# Altium PCB PanelFK2.PcbDoc
Units mm, origin at the board's own origin, x right, y up, seen from the top; angles counter-clockwise.
Board outline 152.4 x 101.6 mm, 2 copper layers (Top Layer, Bottom Layer); 26 components, 21 nets, 92 pads, 0 vias.
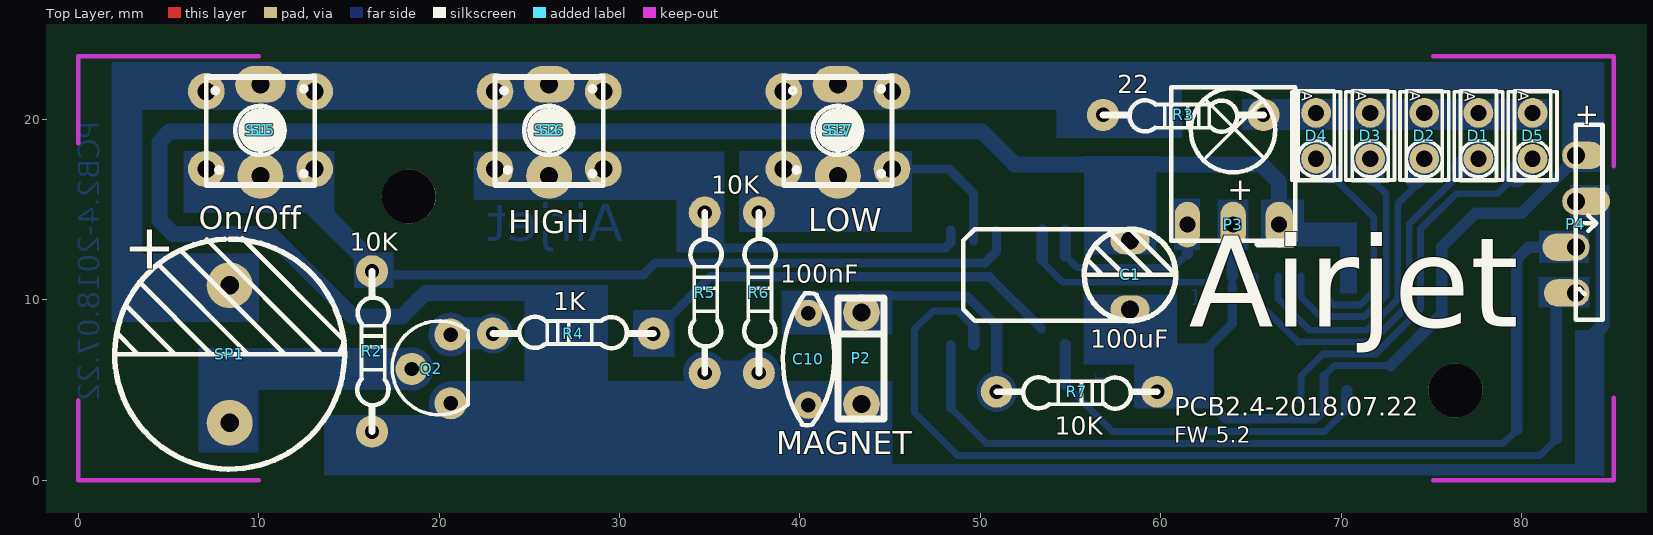
[diagram p0: Top Layer view]
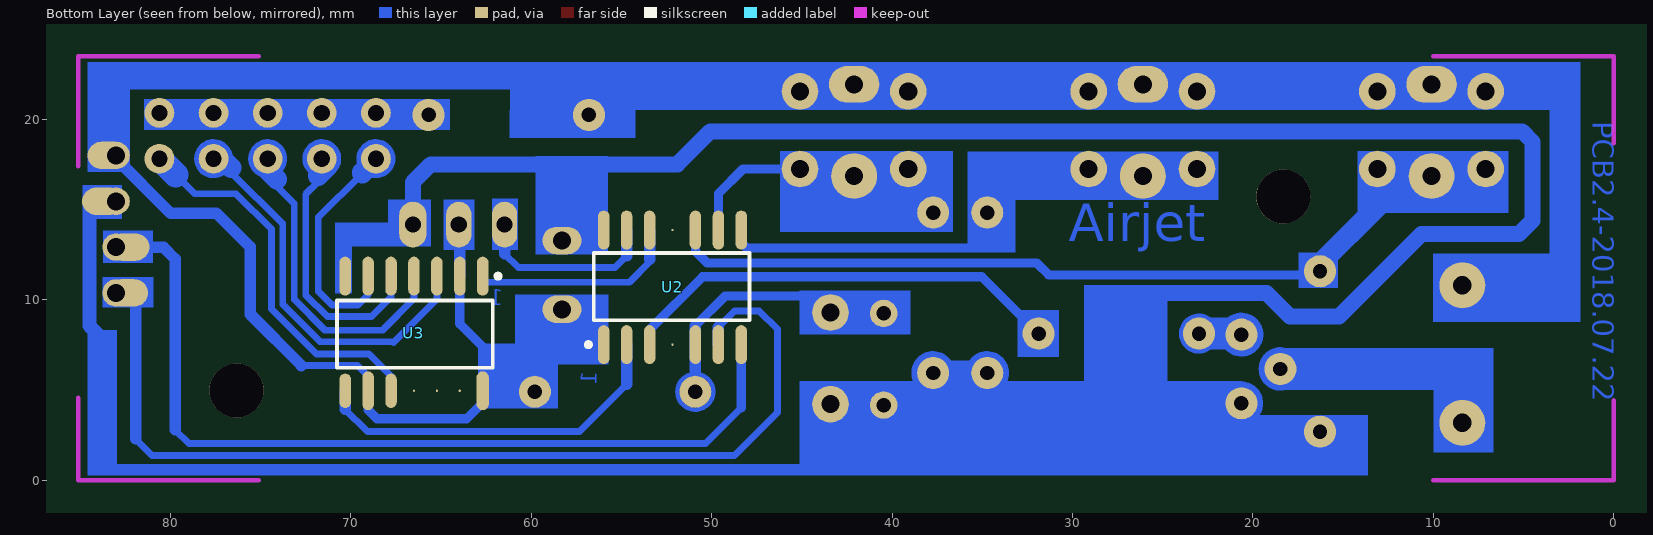
[diagram p1: Bottom Layer view, seen from below]

## Layer stack, top to bottom
Top Solder: solder mask 0.0102, Solder Resist, Dk 3.5
Top Layer: signal copper 0.0356
Dielectric1: dielectric 0.32, FR-4, Dk 4.8
Bottom Layer: signal copper 0.0356
Bottom Solder: solder mask 0.0102, Solder Resist, Dk 3.5

## Board outline
-14.397,-18.256 138.003,-18.256 138.003,83.344 -14.397,83.344

## Design rules (kind name [scope] priority, off if disabled: settings)
Clearance [All] p1: gap=0.254
FabricationTestPointUsage TestPointUsage [All] p1: valid=0 allowmultiple=FALSE
FabricationTestpoint Testpoint [All] p1: side=3 testpointundercomponent=TRUE minsize=1.016 maxsize=2.54 preferedsize=1.524 minholesize=0 maxholesize=1.016 preferedholesize=0.813 testpointgrid=0.025 allowsidetop=TRUE allowsidebottom=TRUE usegrid=TRUE gridtolerance=0
PolygonConnect [All] p1: connectstyle=Relief reliefconductorwidth=0.254 reliefentries=4 polygonreliefangle="90 Angle" airgapwidth=0.254
RoutingVias [All] p1: holewidth=0.711 width=1.27 viastyle="Through Hole" minholewidth=0.711 minwidth=1.27 maxholewidth=0.711 maxwidth=1.27
SolderMaskExpansion [All] p1: expansion=0.102
Width [All] p1: maxlimit=2.54 minlimit=0.254 preferedwidth=0.635 minimp=50.000000 maximp=50.000000 favimp=50.000000
27 further rules are at their usual default settings.

## Classes and differential pairs
component class DDFK: C1 C10 D1 D2 D3 D4 D5 P2 P3 P4 P5 Q2 R2 R4 R5 R6 R7 S1 S2 S3 SP1 U2 U3

## Components (designator, comment, footprint, x,y, rotation, side; value= is the part's Value field where it differs from the comment)
C1 "100uF" RB.15/.2 58.293,10.109 r90 top
C10 "100nF" RAD0.2 40.462,4.166 r90 top
D1 "L1" LED0.5Rec 77.6,19.089 r270 top locked
D2 "L2" LED0.5Rec 74.6,19.089 r270 top locked
D3 "L3" LED0.5Rec 71.6,19.089 r270 top locked
D4 "L4" LED0.5Rec 68.6,19.089 r270 top locked
D5 "L5" LED0.5Rec 80.6,19.089 r270 top locked
P2 "Magnet" Magnet 43.409,9.296 r270 top
P3 "IrReceiver" IrRec1 64,19.4 r0 top locked
P4 "Header 4" xH4RALim 83,18 r180 top
Q2 "2N3904" TO92BS2 20,6.167 r270 top
R2 "10K" RES0.35 16.281,2.692 r90 top
R3 "22" RES0.35 56.794,20.244 r0 top (schematic designator R1)
R4 "1K" RES0.35 31.877,8.128 r180 top
R5 "10K" RES0.35 34.722,5.944 r90 top
R6 "10K" RES0.35 37.719,5.944 r90 top
R7 "10K" RES0.35 50.902,4.902 r0 top
S1 "On/Off" PUSHBOT2 10.1,19.4 r270 top locked
S2 "HIGH" PUSHBOT2 26.1,19.4 r270 top locked
S3 "LOW" PUSHBOT2 42.1,19.4 r270 top locked
S15 "100/2W" PUSHBOT4 10.1,19.4 r180 top
S16 "100/2W" PUSHBOT4 26.1,19.4 r180 top
S17 "100/2W" PUSHBOT4 42.1,19.4 r180 top
SP1 "BUZZER" RB.3/.6 8.392,10.8 r90 top
U2 "ATtiny24A-SSU" SOIC14#1 55.975,7.513 r90 bottom
U3 "MC74HC164AN" SOIC14#2 62.682,11.31 r270 bottom

## Footprints (in the part's own frame and the unit in brackets; to place one, negate y for a bottom-side part, rotate by r counter-clockwise, add the part's x,y. Pads: shape width x height; smd on the part's side, far side on the other; paste and mask are expansions set on the pad)
IrRec1 [mm] "38KHz Ir Receiver"
  oval 1.397x2.54 hole 0.9: 1(-2.531,-5.231) 2(0.009,-5.231)
  oval 1.524x2.54 hole 0.9: 3(2.549,-5.231)
  silkscreen extent -3.42,-6.32 3.44,2.39
LED0.5Rec [mil] "Led 0.5mm Rectangular"
  round 65 hole 35.43: 1(-50,0) 2(50,0)
  silkscreen extent -98,-53 98,53
Magnet [mil]
  round 80 hole 39.37: 1(0,0) 2(200,0)
  silkscreen extent -31,-51 232,49
PUSHBOT2 [mm] "NO-2pin"
  oval 2.032x2.794 hole 1: 1(-2.54,0)
  round 2.54 hole 1: 2(2.54,0)
  silkscreen extent -2.92,-3 3.08,3
PUSHBOT4 [mm]
  round 2.032 hole 1: 1(3,-2.15) 2(3,2.15) 3(-3,-2.15) 4(-3,2.15)
  silkscreen extent -3,-3 3,3
RAD0.2 [mil]
  round 60 hole 31.5: 1(0,0) 2(200,0)
  silkscreen extent -44,-57 244,55
RB.3/.6 [mil]
  round 100 hole 40: 1(0,0) 2(-300,0)
  silkscreen extent -401,-251 102,251
RB.15/.2 [mil]
  oval 60x85 hole 39.37: 1(-25,0) 2(125,0)
  silkscreen extent -50,-100 150,100
RES0.35 [mil] "Diode, Axial; Body 5.2 x 2.7 mm (LxDia. max), Lead Dia. 0.86 mm (max)"
  round 70 hole 31.5: 1(0,0)
  round 70 hole 31.5 paste+0: 2(350,0)
  silkscreen extent 0,-37 350,32
SOIC14#1 [mil] "SOIC, 16-Leads, Body 9.9x3.9mm, Pitch 1.27mm, IPC High Density"
  oval 85x25 smd: 1(0,0) 2(0,-50) 3(0,-100) 5(0,-200) 6(0,-250) 7(0,-300) 8(250.04,-300) 9(250.04,-250) 10(250.04,-200) 12(250.04,-100) 13(250.04,-50) 14(250.04,0)
  round 5 smd: 4(0,-150) 11(250.04,-150)
  silkscreen extent -5,-318 200,38, body extent 16,-318 235,20, height 69
SOIC14#2 [mil] "SOIC, 16-Leads, Body 9.9x3.9mm, Pitch 1.27mm, IPC High Density"
  oval 85x25 smd: 1(0,0) 2(0,-50) 3(0,-100) 4(0,-150) 5(0,-200) 6(0,-250) 7(0,-300) 9(250.04,-250)
  oval 75x25 smd: 8(250.04,-300) 10(250.04,-200)
  round 5 smd: 11(250.04,-150) 12(250.04,-100) 13(250.04,-50)
  oval 85x27 smd: 14(250.04,0)
  silkscreen extent -5,-318 200,38, body extent 16,-318 235,20, height 69
TO92BS2 [mil] "NPN-CC5551,C945 Base Side"
  round 70 hole 31.5: 1(-75,25) 2(0,-60) 3(75,25)
  silkscreen extent -105,-102 100,63
xH4RALim [mil] "100mil between pins"
  round 60 hole 39.37: 1(0,0) 2(0,100) 3(0,200) 4(0,300)
  silkscreen extent -58,-67 0,358

## Part data
C1 C10: library part Cap, "Capacitor SMD"
D1 D2 D3 D4 D5: library part LED0.5, "LED Radial 0.5"
P2: library part "Header 6", "Header, 6-Pin"
P3: library part "Header 3", "3pin"
P4: library part "Header 5", "Header, 5-Pin"
Q2: library part BC337, "NPN General Purpose Amplifier"
R2 R3 R4 R5 R6 R7: library part Resistor, "Resistor"
S1 S2 S3: library part SW-PB, "Push Botton"
U2: library part ATtiny24-16PC, "8-Bit AVR Microcontroller with 2K Bytes of Flash Memory"
U3: "8-Bit Serial Input / Parallel-Output Shift Register"

## Free pads (board coordinates)
  round 3 hole 3: 0(76.327,4.978) 1(18.313,15.723)
  oval 2.286x1.524 all layers, no hole: 2(82.296,12.92) 2(82.372,10.38) 2(83.439,18) 2(83.744,15.46)

## Nets (pads, with @x,y where several pads share a name; then routed paths per layer and width w, separated by ;. In a path a pad name is that pad's centre, name@x,y a point inside that pad or via, vN(x,y) a via of type N, cw(c..) or ccw(c..) an arc to the next point about the centre after c; other vN are vias at no path point)
+5V: C1.1 P3.2 P4.1 pad.2@83.439,18 R3.1 R7.2 S1.1 S2.1 S3.1 S15.1 S15.3 S16.1 S16.3 S17.1 S17.3 SP1.1 U2.1 U3.2 U3.9 U3.14 | length 44
  Bottom Layer w0.381: U3.9@69.032,5.773 69.616,6.357 72.727,6.357
  Bottom Layer w0.508: R7.2 R7.2@60.401,4.293 ; U3.2@63.952,10.802 63.952,8.668 62.682,7.398 U3.14 62.682,4.298 63.576,3.404 68.542,3.404 69.032,3.893 U3.9 ; U3.2@64.009,11.404 P3.2 ; U3.9@69.032,5.366 U3.9 ; U3.9@69.032,5.773 U3.9
  Bottom Layer w0.635: U3.2 P3.2@63.952,14.169 ; 72.727,6.357 75.565,9.195 75.565,12.929 77.439,14.803 79.979,14.803 pad.2@83.071,17.894
BUZZER: R4.1 U2.3 | length 24
  Bottom Layer w0.508: R4.1 35.027,11.278 50.495,11.278 U2.3@53.391,8.382
CLK: U2.2 U3.8 | length 20.4
  Bottom Layer w0.381: 54.705,5.316 57.315,2.705 69.075,2.705 70.302,3.932
  Bottom Layer w0.635: 54.705,5.316 U2.2 ; 70.302,3.932 U3.8
DIMOUT: P4.3 pad.2@82.296,12.92 U2.7 | length 49.1
  Bottom Layer w0.381: 48.355,4.02 50.343,2.032 78.969,2.032 79.731,2.794
  Bottom Layer w0.508: 48.355,4.02 U2.7
  Bottom Layer w0.635: 79.731,2.794 79.731,12.268 80.366,12.903 82.744,12.903 pad.2@83,12.647
GND: C1.2 C10.1 P2.2 P3.3 P4.2 pad.2@83.744,15.46 Q2.3 R2.1 R5.1 R6.1 U2.14 U3.7 | length 124.4
  Bottom Layer w0.635: 21.524,4.262 ccw(c20.635,4.262) 21.524,4.262
  Bottom Layer w0.762: 83.515,7.593 84.48,8.558 pad.2@84.48,14.961
  Bottom Layer w0.889: 27.381,5.156 27.381,8.491 25.483,10.389 19.253,10.389 17.932,9.068 15.237,9.068 10.665,13.64 5.258,13.64 4.496,14.402 4.496,18.745 5.08,19.329 50.063,19.329 51.892,17.501 65.557,17.501 66.549,16.509 P3.3 ; pad.2@83.496,15.46 P4.2 pad.2@83.981,15.46 ; R5.1@35.488,5.944 ccw(c34.722,5.944) R5.1@35.488,5.944 ; R6.1@38.485,5.944 ccw(c37.719,5.944) R6.1@38.485,5.944
IRSEN: P3.1 U2.13 | length 10.4
  Bottom Layer w0.381: 54.705,12.428 55.347,11.786 60.706,11.786 61.469,12.549
  Bottom Layer w0.635: 54.705,12.428 U2.13 ; 61.469,12.549 P3.1
KEY1: R2.2 S1.2 S15.2 S15.4 U2.10 | length 46.2
  Bottom Layer w0.508: 12.09,16.078 12.598,16.078 ; R2.2@16.612,11.659 16.485,11.379 31.318,11.379 31.979,12.04 50.241,12.04 50.895,12.693 U2.10
  Bottom Layer w0.635: S1.2@9.95,16.86 S15.4@13.772,16.86
  Bottom Layer w1.143: 12.789,15.481 R2.2@16.612,11.659
KEY2: R5.2 S2.2 S16.2 S16.4 U2.8 | length 25.3
  Bottom Layer w0.508: S2.2 32.644,16.86 35.357,14.148 35.357,13.233 35.712,12.878 48.057,12.878 48.355,13.176 U2.8
KEY3: R6.2 S3.2 S17.2 S17.4 U2.9 | length 7.7
  Bottom Layer w0.508: S17.4 48.257,17.25 49.625,15.882 U2.9 U2.9@49.625,13.252
MAGNET: C10.2 P2.1 R7.1 U2.5 | length 20.4
  Bottom Layer w0.254: 51.893,4.902 ccw(c50.902,4.902) 51.893,4.902
  Bottom Layer w0.508: 41.542,9.36 42.393,10.211 49.251,10.211 U2.5@50.895,8.567
  Bottom Layer w0.635: R7.1@50.895,4.775 U2.5 U2.5@50.895,8.567
NetD1_1: D1.1 D2.1 D3.1 D4.1 D5.1 R3.2
NetD1_2: D1.2 U3.3 | length 26.4
  Bottom Layer w0.381: U3.3 65.222,10.04 67.635,7.627 67.686,7.678 71.691,7.678 73.762,9.748 73.762,14.193 76.619,17.051 76.619,17.31
  Bottom Layer w0.635: D1.2@78.362,17.819 ccw(c77.6,17.819) D1.2@78.362,17.819
  Bottom Layer w1.143: 76.619,17.31 77.128,17.819 D1.2
NetD2_2: D2.2 U3.4 | length 22.2
  Bottom Layer w0.381: U3.4 66.492,10.065 68.245,8.313 71.428,8.313 73.127,10.011 73.127,15.316 74.117,16.307
  Bottom Layer w0.635: D2.2@75.362,17.819 ccw(c74.6,17.819) D2.2@75.362,17.819
  Bottom Layer w1.143: 74.092,16.688 D2.2@75.064,17.66
NetD3_2: D3.2 U3.5 | length 20.6
  Bottom Layer w0.381: U3.5 67.762,10.165 68.852,9.075 71.292,9.075 72.492,10.274 72.492,15.85 71.819,16.523 71.819,16.904 ; D3.2@71.752,17.971 D3.2@72.027,17.697 ; 71.755,16.485 72.098,16.827
  Bottom Layer w0.635: D3.2@72.362,17.819 ccw(c71.6,17.819) D3.2@72.362,17.819
  Bottom Layer w1.143: D3.2@71.308,17.389 71.806,16.891 ; D3.2@71.6,17.325 D3.2
NetD4_2: D4.2 U3.6 | length 17.8
  Bottom Layer w0.381: U3.6 69.032,10.269 69.591,9.71 71.029,9.71 71.799,10.479 71.799,14.561 69.355,17.005
  Bottom Layer w0.635: D4.2@69.362,17.819 ccw(c68.6,17.819) D4.2@69.362,17.819
  Bottom Layer w1.143: D4.2 69.355,17.064 69.355,17.005
NetD5_2: D5.2 U3.10 | length 21.8
  Bottom Layer w0.381: U3.10@67.762,4.451 U3.10 67.762,5.773 68.981,6.992 71.904,6.992 74.397,9.485 74.397,13.93 76.342,15.875 78.638,15.875 79.692,16.929
  Bottom Layer w1.397: 79.692,16.929 80.582,17.819 D5.2
NetQ2_1: Q2.1 R4.2 | length 9.8
  Bottom Layer w0.635: 21.533,8.072 ccw(c20.635,8.072) 21.533,8.072
  Bottom Layer w0.889: R4.2@23.647,8.128 ccw(c22.987,8.128) R4.2@23.647,8.128
NetQ2_2: Q2.2 SP1.2 | length 5.6
  Bottom Layer w0.635: 19.365,6.167 ccw(c18.476,6.167) 19.365,6.167
SERDATA: U2.12 U3.1 | length 13.4
  Bottom Layer w0.381: U2.12 53.435,12.097 54.559,10.973 62.682,10.973 U3.1
  Bottom Layer w0.635: 53.435,12.238 U2.12
VMIC: 
ZEROC: P4.4 pad.2@82.372,10.38 U2.6 | length 54.6
  Bottom Layer w0.381: U2.6@49.625,8.491 48.73,9.385 47.358,9.385 46.355,8.382 46.355,3.759 48.743,1.372 81.001,1.372 81.915,2.286
  Bottom Layer w0.635: U2.6 U2.6@49.625,8.491 ; 81.915,2.286 pad.2@81.915,10.287
pads on no net: U2.4 U2.11 U3.11 U3.12 U3.13

## Keep-outs
Keep-Out Layer:
  lines w0.254: 0,4.42 0,0 10,0 ; 0,18.669 0,23.5 10,23.5 ; 75.1,0 85.1,0 85.1,4.572 ; 75.1,23.5 85.1,23.5 85.1,17.399

## Other copper
Bottom Layer:
  rectangle net KEY2: 33.147,12.624 35.814,15.519
  rectangle net GND: 65.557,12.954 67.945,15.545
  rectangle net NetQ2_1: 20.279,7.239 22.987,9.017
  rectangle net NetQ2_2: 6.68,5.004 18.466,7.341
  rectangle net GND: 15.773,0.254 84.582,0.889
  rectangle net GND: 21.514,0.61 45.136,5.486
  rectangle net KEY1: 5.842,14.808 14.199,18.257
  rectangle net KEY2: 21.92,15.519 35.814,18.232
  rectangle net KEY3: 36.627,13.762 46.203,18.257
  rectangle net +5V: 55.702,6.426 60.884,10.287
  rectangle net GND: 55.753,12.522 59.766,17.958
  region net GND: 69.921,14.282 69.921,10.345 70.866,10.345 70.866,14.282
  rectangle net +5V: 2.057,20.523 61.163,23.19
  rectangle net BUZZER: 30.759,6.833 33.045,9.423
  rectangle net +5V: 1.854,8.763 3.556,23.19
  rectangle net +5V: 3.556,8.763 10.008,12.573
  rectangle net NetQ2_2: 6.68,1.524 9.982,5.004
  rectangle net +5V: 61.163,21.666 84.582,23.19
  rectangle net +5V: 82.22,17.094 84.582,21.666
  rectangle net NetD1_1: 64.491,19.406 81.458,21.133
  rectangle net +5V: 63.144,12.751 64.846,15.57
  rectangle net GND: 13.614,0.254 22.25,3.607
  rectangle net +5V: 58.522,3.962 62.89,7.569
  rectangle net MAGNET: 38.989,8.077 45.136,10.516
  rectangle net GND: 82.677,14.478 84.861,16.358
  rectangle net DIMOUT: 80.95,12.04 83.718,13.843
  rectangle net ZEROC: 80.924,9.576 83.744,11.252
  rectangle net GND: 82.956,0.889 84.582,8.331
  rectangle net GND: 67.945,12.954 69.921,14.282
  rectangle net IRSEN: 60.731,12.751 62.179,15.621
  rectangle net GND: 20.599,3.023 22.25,5.486
  rectangle net GND: 35.585,5.436 36.906,6.629
  rectangle net +5V: 54.229,18.974 61.189,20.523
  rectangle net KEY1: 15.291,10.643 17.475,12.624
  rectangle net GND: 24.74,5.385 29.362,10.82
  text "PCB2.4-2018.07.22" at 1.549,19.888 h2 r90
  text "Airjet" at 30.201,12.548 h3.56
  text "1" at 61.544,9.398 h1.52
  text "1" at 56.058,6.045 h1.52 r270

## Silkscreen, mask and mechanical layers (free items; w line width, h text height)
Top Overlay:
  circle w0.254: c64,19.4 r2.337
  lines w0.203: 62.459,21.107 65.634,17.932 ; 62.509,17.907 65.684,21.082
  lines w0.254: 58.183,13.917 49.68,13.917 49.047,13.284 49.047,9.474 49.682,8.839 58.369,8.839
  text "+" at 82.702,20.93 h2.03 r270
  text "+" at 63.678,15.519 h1.27
  text "+" at 2.489,11.709 h2.54
  text "Airjet" at 61.544,6.833 h8.64
  text "PCB2.4-2018.07.22" at 60.731,3.226 h1.78
  text "FW 5.2" at 60.731,1.778 h1.52
  text "MAGNET" at 38.684,1.448 h1.27

## Text inside footprints (layer, text, board x,y; h text height)
D1: Top Overlay "A" at 76.657,21.539 h1 r270
D2: Top Overlay "A" at 73.6,21.559 h1 r270
D3: Top Overlay "A" at 70.6,21.559 h1 r270
D4: Top Overlay "A" at 67.6,21.559 h1 r270
D5: Top Overlay "A" at 79.6,21.559 h1 r270